# Altium PCB PCB_Master_Traffic_Light.PcbDoc
Units mm, origin at the board's own origin, x right, y up, seen from the top; angles counter-clockwise.
Board outline 128.52 x 89.79 mm, 2 copper layers (Top Layer, Bottom Layer); 46 components, 52 nets, 237 pads, 98 vias.
Unrouted connection lines stored in the file: 1.
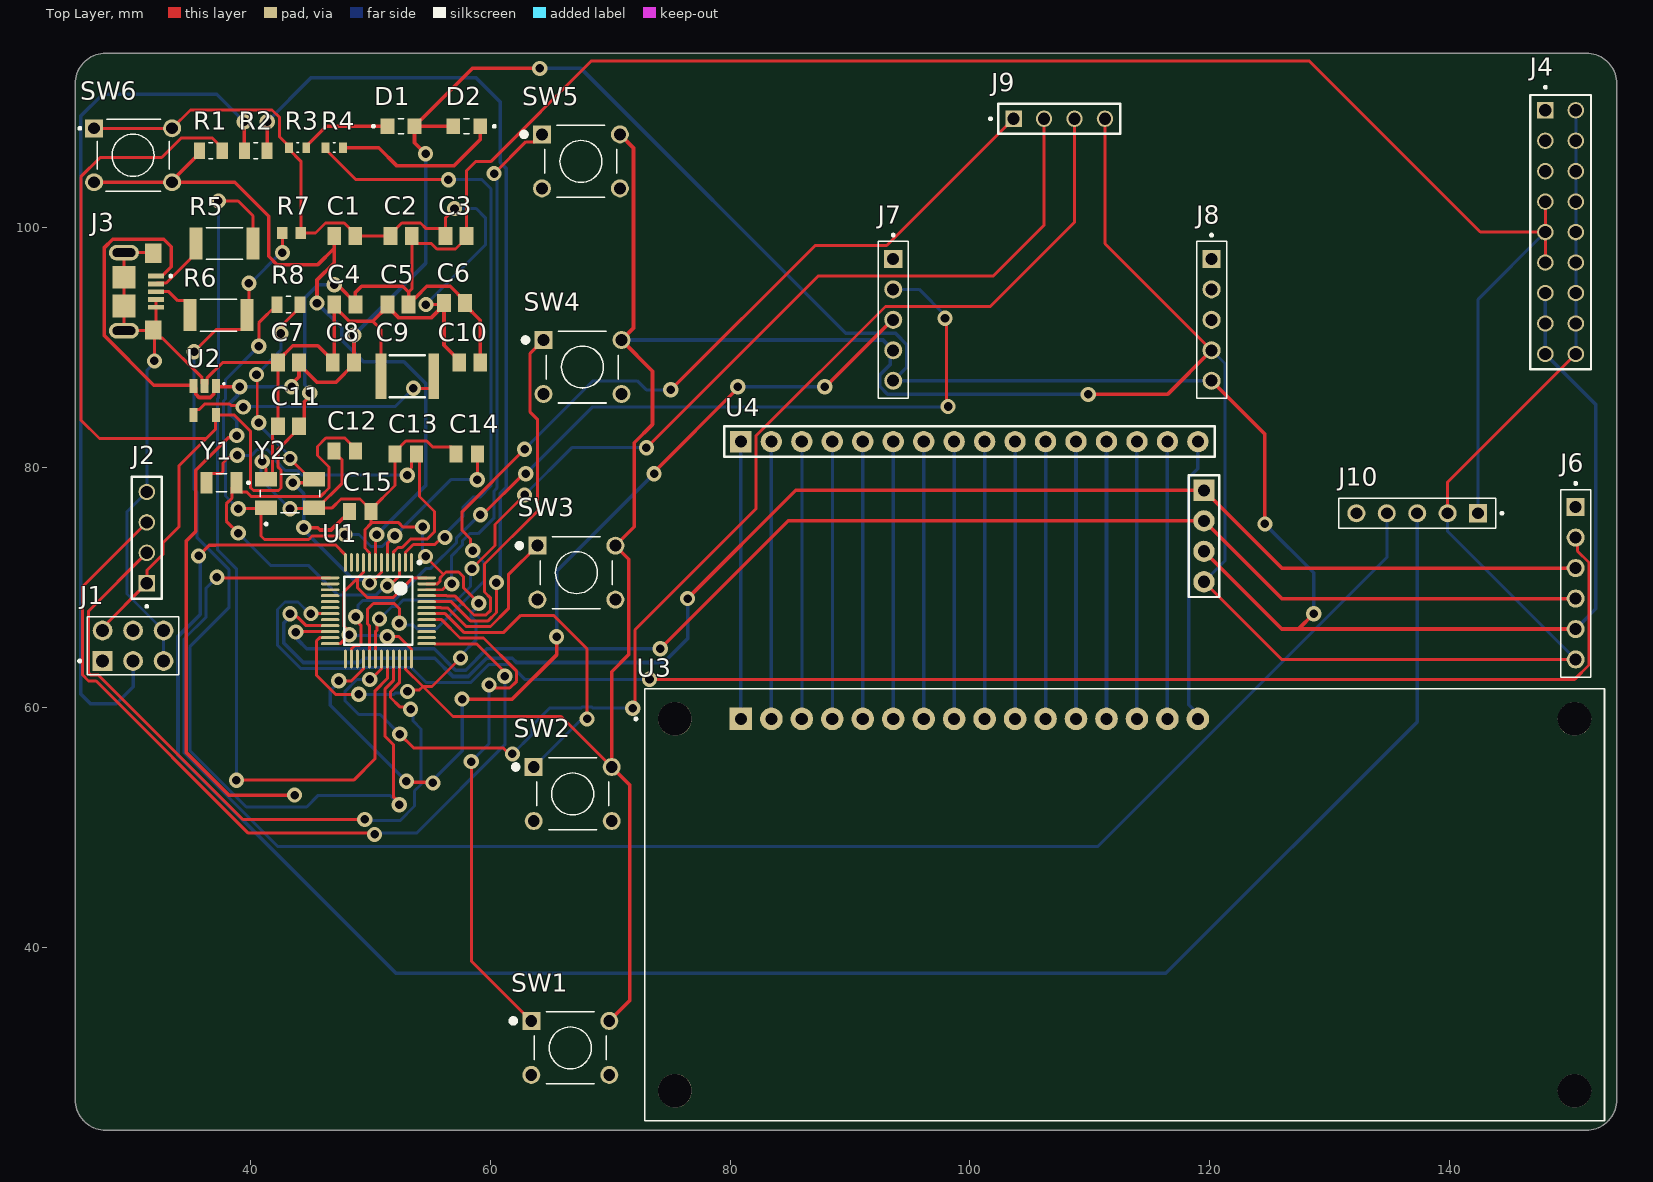
[diagram p0: Top Layer view]
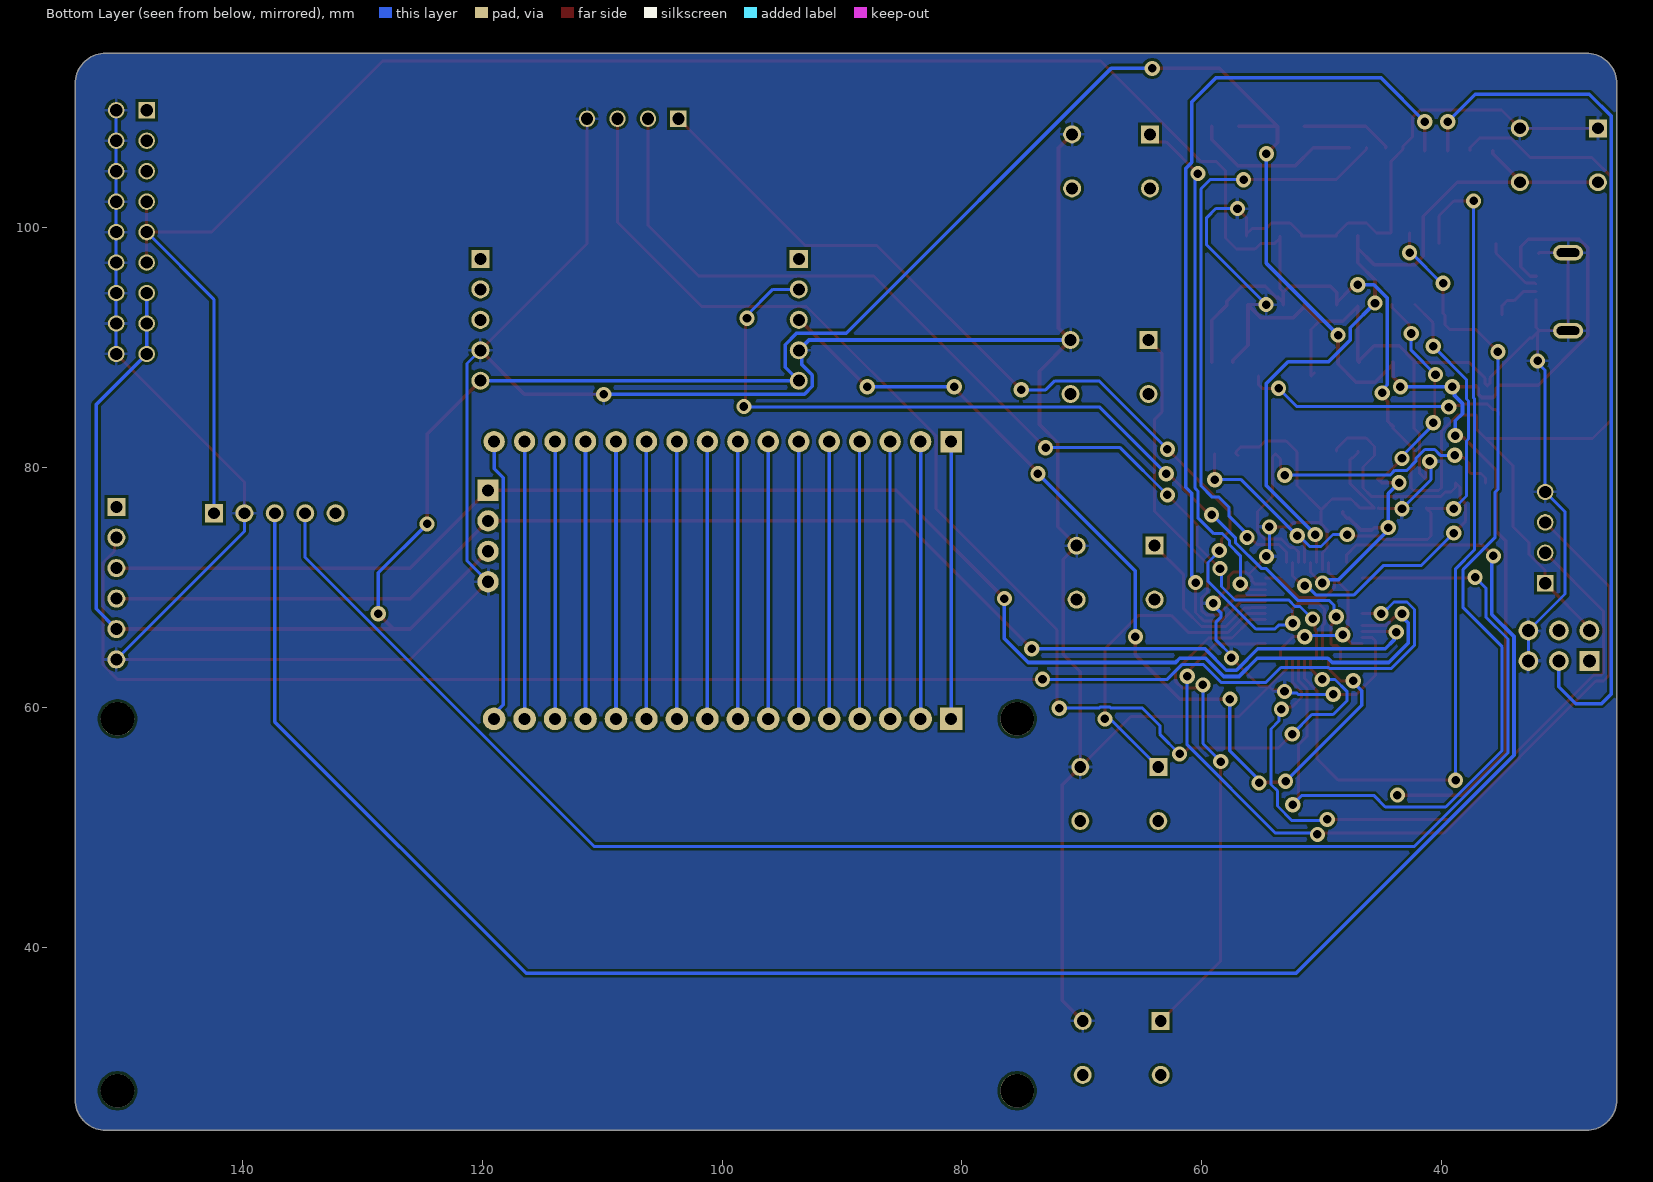
[diagram p1: Bottom Layer view, seen from below]

## Layer stack, top to bottom
Top Solder: solder mask 0.0102, Solder Resist, Dk 3.5
Top Layer: signal copper 0.0356
Dielectric 1: dielectric 0.32, FR-4, Dk 4.8
Bottom Layer: signal copper 0.0356
Bottom Solder: solder mask 0.0102, Solder Resist, Dk 3.5

## Board outline
25.4,112.014 cw(c27.94,112.014) 27.94,114.554 151.384,114.554 cw(c151.384,112.014) 153.924,112.014 153.924,27.305 cw(c151.384,27.305) 151.384,24.765 27.94,24.765 cw(c27.94,27.305) 25.4,27.305 25.4,36.449

## Design rules (kind name [scope] priority, off if disabled: settings)
Clearance [All] p1: gap=0.23 ignorepadtopadclearanceinfootprint=FALSE
PolygonConnect [All] p1: connectstyle=Relief reliefconductorwidth=0.254 reliefentries=4 polygonreliefangle="90 Angle" airgapwidth=0.254
RoutingVias [All] p1: holewidth=0.711 width=1.27 viastyle="Through Hole" minholewidth=0.711 minwidth=1.27 maxholewidth=0.711 maxwidth=1.27
SolderMaskExpansion [All] p1: expansion=0.102 istentingtop=FALSE
SupplyNets "Schematic Supply Nets" [InNet('GND')] p1: voltage=0.000
Width [All] p1: maxlimit=0.3 minlimit=0.23 preferedwidth=0.25 minimp=50.000000 maximp=50.000000 favimp=50.000000
30 further rules are at their usual default settings.

## Components (designator, comment, footprint, x,y, rotation, side; value= is the part's Value field where it differs from the comment)
C1 "1u" CAPC2012X145N 47.87,99.314 r0 top
C2 "100n" CAPC2012X100N#1 52.578,99.314 r0 top
C3 "100n" CAPC2012X100N#1 57.15,99.314 r0 top
C4 "100n" CAPC2012X100N#1 47.879,93.599 r0 top
C5 "100n" CAPC2012X100N#1 52.315,93.599 r0 top
C6 "100n" CAPC2012X100N#1 57.023,93.726 r0 top
C7 "1u" CAPC2012X145N 43.18,88.773 r0 top
C8 "100n" CAPC2012X100N#1 47.752,88.773 r0 top
C9 "22nF" WCAP-CSGP_1812_L4.5W3.2H1.25 53.086,87.63 r0 top
C10 "10u" CAPC2012X100N#1 58.293,88.773 r0 top
C11 "100n" CAPC2012X100N#1 43.18,83.439 r0 top
C12 "20p" CAPC2012X100N#2 47.879,81.407 r0 top
C13 "20p" CAPC2012X100N#2 52.959,81.153 r0 top
C14 "20p" CAPC2012X100N#2 58.039,81.153 r0 top
C15 "20p" CAPC2012X100N#2 49.149,76.327 r180 top
D1 "7012X1" LED_7012X1 52.56,108.458 r0 top
D2 "7012X1" LED_7012X1 58.039,108.458 r180 top
J1 "67997-106HLF" AMPHENOL_67997-106HLF 30.226,65.151 r0 top
J2 "HTSW-104-23-SM-S" SAMTEC_HTSW-104-23-SM-S 31.369,74.168 r270 top
J3 "2013499-1" TE_2013499-1 29.464,94.672 r270 top
J4 "ASM1117" SAMTEC_MTSW-109-13-G-D-905 147.968,109.8 r270 top
J6 "DS3231" HARWIN_M20-7820646 150.495,70.358 r90 top
J7 "LED1" HARWIN_M20-7820546 93.599,92.329 r90 top
J8 "LED2" HARWIN_M20-7820546 120.142,92.329 r90 top
J9 "Traffic Light" SAMTEC_HTSW-104-23-SM-S 107.442,109.093 r180 top
J10 "HC12" HARWIN_M20-7820546 137.287,76.2 r0 top
R1 "10k" RESC2012X60N 36.703,106.426 r180 top
R2 "100k" RESC2012X60N 40.452,106.426 r180 top
R3 "ERJPA3F5100V" RES_ERJPA3F5100V 43.942,106.68 r180 top
R4 "ERJPA3F5100V" RES_ERJPA3F5100V 46.99,106.68 r180 top
R5 "20R" RESC5025X120N 37.846,98.679 r180 top
R6 "20R" RESC5025X120N 37.338,92.71 r180 top
R7 "4k7" RESC1608X55N 43.434,99.568 r180 top
R8 "1M" RESC2012X60N 43.18,93.599 r180 top
SW1 "Button - Normal Mode" SW_FSM8JH 66.675,31.623 r0 top
SW2 "Button - Heavy Mode" SW_FSM8JH 66.877,52.796 r0 top
SW3 "Button - Night Mode" SW_FSM8JH 67.183,71.247 r0 top
SW4 "Button - Control Mode" SW_FSM8JH 67.691,88.392 r0 top
SW5 "Button - Control State" SW_FSM8JH 67.564,105.537 r0 top
SW6 "1825910-6" SW_1825910-6-4 30.226,106.045 r0 top
U1 "STM32F103C8T6" STM-LQFP48_L 50.673,68.072 r270 top
U2 "RT9193-33GB" SOT94P279X129-5N 36.195,85.598 r270 top
U3 "LCD-16X2" MODULE_LCD-16X2 112.899,43.555 r0 top
U4 "I2C" PCF8574 80.899,82.169 r0 top
Y1 "32.768K" XTAL_NX3215SA-32.768K-STD-MUA-14 37.592,78.74 r180 top
Y2 "8MHz" XTAL_ABM3B-8.000MHZ-10-1-U-T 43.307,77.851 r90 top

## Footprints (in the part's own frame and the unit in brackets; to place one, negate y for a bottom-side part, rotate by r counter-clockwise, add the part's x,y. Pads: shape width x height; smd on the part's side, far side on the other; paste and mask are expansions set on the pad)
AMPHENOL_67997-106HLF [mm]
  rect 1.65x1.65 hole 1.1: 01(-2.54,-1.27)
  round 1.65 hole 1.1: 02(-2.54,1.27) 03(0,-1.27) 04(0,1.27) 05(2.54,-1.27) 06(2.54,1.27)
  silkscreen extent -4.56,-2.41 3.81,2.41, body extent -3.81,-2.41 3.81,2.41, height 8.38
CAPC2012X100N#1 [mm]
  rect 1.15x1.47 smd: 1(-0.88,0) 2(0.88,0)
  body extent -1,-0.63 1,0.63, height 1
CAPC2012X100N#2 [mm]
  rect 1.08x1.42 smd: 1(-0.895,0) 2(0.895,0)
  body extent -1,-0.63 1,0.63, height 1
CAPC2012X145N [mm]
  rect 1.15x1.47 smd: 1(-0.88,0) 2(0.88,0)
  body extent -1,-0.63 1,0.63, height 1.45
HARWIN_M20-7820546 [mm]
  rect 1.508x1.508 / inner round 1.508 / far side rect 1.508x1.508 hole 1: 1(5.08,0)
  round 1.508 hole 1: 2(2.54,0) 3(0,0) 4(-2.54,0) 5(-5.08,0)
  silkscreen extent -6.55,-1.25 7.16,1.25
HARWIN_M20-7820646 [mm]
  rect 1.508x1.508 / inner round 1.508 / far side rect 1.508x1.508 hole 1: 1(6.35,0)
  round 1.508 hole 1: 2(3.81,0) 3(1.27,0) 4(-1.27,0) 5(-3.81,0) 6(-6.35,0)
  silkscreen extent -7.82,-1.25 8.43,1.25
LED_7012X1 [mm]
  rect 1.15x1.3 smd: A(1.125,0) C(-1.125,0)
  silkscreen extent -2.4,-0.63 0.23,0.63, body extent -0.62,-1 0.62,1, height 0.73
MODULE_LCD-16X2 [mm]
  rect 1.88x1.88 / inner round 1.88 / far side rect 1.88x1.88 hole 1.016: 1(-32,15.5)
  round 1.88 hole 1.016: 2(-29.46,15.5) 3(-26.92,15.5) 4(-24.38,15.5) 5(-21.84,15.5) 6(-19.3,15.5) 7(-16.76,15.5) 8(-14.22,15.5) 9(-11.68,15.5) 10(-9.14,15.5) 11(-6.6,15.5) 12(-4.06,15.5) 13(-1.52,15.5) 14(1.02,15.5) 15(3.56,15.5) 16(6.1,15.5)
  round 2.8 hole 2.8 unplated: ""(-37.5,-15.5) ""(-37.5,15.5) ""(37.5,-15.5) ""(37.5,15.5)
  silkscreen extent -40.85,-18 40,18, body extent -40,-18 40,18, height 10.2
PCF8574 [mil]
  rect 70x70 hole 40: 1(0,0) 17(1520,-160)
  round 70 hole 40: 2(100,0) 3(200,0) 4(300,0) 5(400,0) 6(500,0) 7(600,0) 8(700,0) 9(800,0) 10(900,0) 11(1000,0) 12(1100,0) 13(1200,0) 14(1300,0) 15(1400,0) 16(1500,0) 18(1520,-260) 19(1520,-360) 20(1520,-460)
  silkscreen extent -55,-510 1570,50, body extent -62,-659 1572,50, height 330
RES_ERJPA3F5100V [mm]
  rect 0.65x0.9 smd: 1(-0.725,0) 2(0.725,0)
  silkscreen extent -0.08,-0.4 0.08,0.4, body extent -0.8,-0.4 0.8,0.4, height 0.45
RESC1608X55N [mm]
  rect 0.87x0.97 smd: 1(-0.78,0) 2(0.78,0)
  body extent -0.8,-0.4 0.8,0.4, height 0.55
RESC2012X60N [mm]
  rect 0.92x1.38 smd: 1(-0.955,0) 2(0.955,0)
  silkscreen extent -0.17,-0.68 0.17,0.68, body extent -1,-0.63 1,0.63, height 0.6
RESC5025X120N [mm]
  rect 1.07x2.67 smd: 1(-2.38,0) 2(2.38,0)
  silkscreen extent -1.52,-1.32 1.52,1.32
SAMTEC_HTSW-104-23-SM-S [mm]
  rect 1.37x1.37 / inner round 1.37 / far side rect 1.37x1.37 hole 1.02: 01(3.81,0)
  round 1.37 hole 1.02: 02(1.27,0) 03(-1.27,0) 04(-3.81,0)
  silkscreen extent -5.08,-1.24 5.83,1.24
SAMTEC_MTSW-109-13-G-D-905 [mm]
  rect 1.37x1.37 hole 1.02: 01(0,0)
  round 1.37 hole 1.02: 02(0,2.54) 03(2.54,0) 04(2.54,2.54) 05(5.08,0) 06(5.08,2.54) 07(7.62,0) 08(7.62,2.54) 09(10.16,0) 10(10.16,2.54) 11(12.7,0) 12(12.7,2.54) 13(15.24,0) 14(15.24,2.54) 15(17.78,0) 16(17.78,2.54) 17(20.32,0) 18(20.32,2.54)
  silkscreen extent -2.02,-1.27 21.59,3.81
SOT94P279X129-5N [mm]
  rrect12% 1.17x0.67 smd: 1(-1.22,0.94) 2(-1.22,0) 3(-1.22,-0.94) 4(1.22,-0.94) 5(1.22,0.94)
  silkscreen extent -1.47,1.53 -1.33,1.67, body extent -1.4,-1.45 1.4,1.45, height 1.3
STM-LQFP48_L [mm] "QFP, 48-Leads, Body 7x7mm, Pitch 0.5mm, IPC High Density"
  oval 1.55x0.25 smd: 1(-4.025,2.75) 2(-4.025,2.25) 3(-4.025,1.75) 4(-4.025,1.25) 5(-4.025,0.75) 6(-4.025,0.25) 7(-4.025,-0.25) 8(-4.025,-0.75) 9(-4.025,-1.25) 10(-4.025,-1.75) 11(-4.025,-2.25) 12(-4.025,-2.75) 25(4.025,-2.75) 26(4.025,-2.25) 27(4.025,-1.75) 28(4.025,-1.25) 29(4.025,-0.75) 30(4.025,-0.25) 31(4.025,0.25) 32(4.025,0.75) 33(4.025,1.25) 34(4.025,1.75) 35(4.025,2.25) 36(4.025,2.75)
  oval 0.25x1.55 smd: 13(-2.75,-4.025) 14(-2.25,-4.025) 15(-1.75,-4.025) 16(-1.25,-4.025) 17(-0.75,-4.025) 18(-0.25,-4.025) 19(0.25,-4.025) 20(0.75,-4.025) 21(1.25,-4.025) 22(1.75,-4.025) 23(2.25,-4.025) 24(2.75,-4.025) 37(2.75,4.025) 38(2.25,4.025) 39(1.75,4.025) 40(1.25,4.025) 41(0.75,4.025) 42(0.25,4.025) 43(-0.25,4.025) 44(-0.75,4.025) 45(-1.25,4.025) 46(-1.75,4.025) 47(-2.25,4.025) 48(-2.75,4.025)
  silkscreen extent -4.15,-2.85 2.85,3.55, body extent -3.5,-3.5 3.5,3.5, height 1.6
SW_1825910-6-4 [mm]
  rect 1.498x1.498 / inner round 1.498 / far side rect 1.498x1.498 hole 0.99: 1(-3.25,2.25)
  round 1.498 hole 0.99: 2(3.25,2.25) 3(-3.25,-2.25) 4(3.25,-2.25)
  silkscreen extent -4.54,-3 3,3, body extent -3,-3.9 3,3.9, height 5.01
SW_FSM8JH [mm]
  rect 1.498x1.498 / inner round 1.498 / far side rect 1.498x1.498 hole 0.99: 1(-3.25,2.25)
  round 1.498 hole 0.99: 2(-3.25,-2.25) 3(3.25,2.25) 4(3.25,-2.25)
  silkscreen extent -4.95,-3 3,3, body extent -3,-3.95 3,3.95, height 9.5
TE_2013499-1 [mm]
  rect 0.4x1.35 smd: 1(-1.3,2.675) 2(-0.65,2.675) 3(0,2.675) 4(0.65,2.675) 5(1.3,2.675)
  rect 1.6x1.4 smd: SH1(-3.2,2.45) SH4(3.2,2.45)
  rect 1.9x1.9 smd: SH2(-1.2,0) SH3(1.2,0)
  oval 1.31x2.5 hole 0.71 slot 1.9 at 90 deg: SH5(3.255,0) SH6(-3.255,0)
  silkscreen extent -1.4,3.8 -1.2,4, body extent -4,-2.49 4,3.11, height 2.76
WCAP-CSGP_1812_L4.5W3.2H1.25 [mm] "Ceramic Capacitors, body 4.5x3.2mm"
  rect 0.9x3.8 smd: 1(-2.2,0) 2(2.2,0)
  silkscreen extent -1.45,-1.75 1.45,1.75, body extent -2.25,-1.6 2.25,1.6, height 1.25
XTAL_ABM3B-8.000MHZ-10-1-U-T [mm]
  rect 1.2x1.8 smd: 1(-1.2,2) 2(-1.2,-2) 3(1.2,-2) 4(1.2,2)
  silkscreen extent -2.65,-2.5 1.6,2.5, body extent -1.58,-2.5 1.6,2.5, height 1.1
XTAL_NX3215SA-32.768K-STD-MUA-14 [mm]
  rect 1x1.8 smd: 1(-1.25,0) 2(1.25,0)
  silkscreen extent -2.35,-0.75 0.43,0.75

## Part data
C1 C7: library part C2012X5R1E105K125AA, "1 ÂµF Â±10% 25V Ceramic Capacitor X5R 0805 (2012 Metric)", Package="2012 TDK", Check_prices=https://www.snapeda.com/parts/C2012X5R1E105K125AA/TDK/view-part/?ref=eda, Digi-Key_Part_Number=445-1419-2-ND, MF=TDK, MP=C2012X5R1E105K125AA, SnapEDA_Link=https://www.snapeda.com/parts/C2012X5R1E105K125AA/TDK/view-part/?ref=snap
C2 C3 C4 C5 C6 C8 C11: library part C2012X7R1H104K085AA, "0.1 ÂµF Â±10% 50V Ceramic Capacitor X7R 0805 (2012 Metric)", Package="2012 TDK", Check_prices=https://www.snapeda.com/parts/C2012X7R1H104K085AA/TDK/view-part/?ref=eda, Digi-Key_Part_Number=445-7534-1-ND, MF=TDK, MP=C2012X7R1H104K085AA, Purchase-URL=https://pricing.snapeda.com/search/part/C2012X7R1H104K085AA/?ref=eda, SnapEDA_Link=https://www.snapeda.com/parts/C2012X7R1H104K085AA/TDK/view-part/?ref=snap
C9: library part 885012010015, "WCAP-CSGP Multilayer Ceramic Chip Capacitor, General Purpose, size 1812, NP0, 22nF, 50V", Capacitance Tolerance=+/-5%, Case/Size Code=1812, Insulation Resistance=10GΩ, Manufacturer="Wurth Elektronik", Max Operating Temperature=125°C, Min Operating Temperature=-55°C, Rated Voltage (DC)=50V, Capacitance=22nF, Category="Multilayer Ceramic Chip Capacitors", Ceramic Type=NP0, ComponentLink1Description="Website Link", ComponentLink1URL=https://www.we-online.com/redexpert/article/885012010015?ad, ComponentLink2Description="Datasheet Link", ComponentLink2URL=https://www.we-online.com/redexpert/spec/885012010015?ad, Height=1.25mm, Length=4.5mm, Manufacturer Part Number=885012010015, Match Code=WCAP-CSGP, Mount="Surface Mount", Packaging="Tape and Reel", Q Factor=1000, Technical Reference=NP01812223J050DFCT10000, Width=3.2mm
C10: library part C2012X5R1C106M085AC, "10ÂµF Â±20% 16V Ceramic Capacitor X5R 0805 (2012 Metric)", Package="2012 TDK", Availability="In Stock", Check_prices=https://www.snapeda.com/parts/C2012X5R1C106M085AC/TDK/view-part/?ref=eda, MF=TDK, MP=C2012X5R1C106M085AC, Price=None, Purchase-URL=https://pricing.snapeda.com/search/part/C2012X5R1C106M085AC/?ref=eda, SnapEDA_Link=https://www.snapeda.com/parts/C2012X5R1C106M085AC/TDK/view-part/?ref=snap
C12 C13 C14 C15: library part GQM2195C2E200JB12D, "SMD Capacitor C0G(EIA) with Capacitance: 20pF Tol. 5%. Rated Voltage: 250Vdc", Package="2012 Murata", Availability=Warning, MF=Murata, MP=GQM2195C2E200JB12D, Price=None, Purchase-URL=https://pricing.snapeda.com/search/part/GQM2195C2E200JB12D/?ref=eda, SnapEDA_Link=https://www.snapeda.com/parts/GQM2195C2E200JB12D/Murata/view-part/4378826/?ref=snap
D1 D2: "Red - LED Indication - Discrete 1.7V 0805 (2012 Metric)", Package="0805 Visual Communications", Availability="In Stock", Check_prices=https://www.snapeda.com/parts/7012X1/Visual+Communications/view-part/?ref=eda, MF=VCC, MP=7012X1, Price=None, Purchase-URL=https://pricing.snapeda.com/search/part/7012X1/?ref=eda, SnapEDA_Link=https://www.snapeda.com/parts/7012X1/Visual+Communications/view-part/?ref=snap
J1: "BergStikÂ®, Board to Board connector, Unshrouded vertical header, Through Hole, Double Row, 6 Positions, 2.54 mm (0.100in) Pitch", Package=None, Availability="In Stock", Check_prices=https://www.snapeda.com/parts/67997-106HLF/Amphenol+FCI/view-part/?ref=eda, MF="Amphenol ICC", MP=67997-106HLF, Price=None, Purchase-URL=https://pricing.snapeda.com/search/part/67997-106HLF/?ref=eda, SnapEDA_Link=https://www.snapeda.com/parts/67997-106HLF/Amphenol+FCI/view-part/?ref=snap
J2: "HEADER, 4 CONTACTS, 1 ROW, THROUGH HOLE, 2.54 MM; Connector Systems:Board-to-Board; Pitch Spacing:2.54mm; No. of Rows:1Rows; No. of Contacts:4Contacts; Contact Termination Type:Through Hole; Product Range:HTSW Series; Gender:Header RoHS Compliant: Yes", Package=None, Availability="In Stock", Check_prices=https://www.snapeda.com/parts/HTSW10423SMS/Samtec/view-part/?ref=eda, MF=Samtec, MP=HTSW10423SMS, Price=None, Purchase-URL=https://pricing.snapeda.com/search/part/HTSW10423SMS/?ref=eda, SnapEDA_Link=https://www.snapeda.com/parts/HTSW10423SMS/Samtec/view-part/?ref=snap
J3: Package=None, Availability=Unavailable, MP=2013499-1, Price=None
J4: library part MTSW-109-13-G-D-905, Package=None, Availability=Unavailable, MP=MTSW-109-13-G-D-905, Price=None
J6: library part M20-7820646, Package=None, Availability=Unavailable, MP=M20-7820646, Price=None
J7 J8 J10: library part M20-7820546, Package=None, Availability=Unavailable, MP=M20-7820546, Price=None
J9: library part HTSW-104-23-SM-S, "HEADER, 4 CONTACTS, 1 ROW, THROUGH HOLE, 2.54 MM; Connector Systems:Board-to-Board; Pitch Spacing:2.54mm; No. of Rows:1Rows; No. of Contacts:4Contacts; Contact Termination Type:Through Hole; Product Range:HTSW Series; Gender:Header RoHS Compliant: Yes", Package=None, Availability="In Stock", Check_prices=https://www.snapeda.com/parts/HTSW10423SMS/Samtec/view-part/?ref=eda, MF=Samtec, MP=HTSW10423SMS, Price=None, Purchase-URL=https://pricing.snapeda.com/search/part/HTSW10423SMS/?ref=eda, SnapEDA_Link=https://www.snapeda.com/parts/HTSW10423SMS/Samtec/view-part/?ref=snap
R1: library part RC0805FR-0710KL, "10 kOhms Â±1% 0.125W, 1/8W Chip Resistor 0805 (2012 Metric) Moisture Resistant Thick Film", Package="2012 Rohm Semiconductor", Availability="In Stock", Check_prices=https://www.snapeda.com/parts/RC0805FR-0710KL/Yageo/view-part/?ref=eda, MF=Yageo, MP=RC0805FR-0710KL, Price=None, Purchase-URL=https://pricing.snapeda.com/search/part/RC0805FR-0710KL/?ref=eda, SnapEDA_Link=https://www.snapeda.com/parts/RC0805FR-0710KL/Yageo/view-part/?ref=snap
R2: library part RC0805FR-07100KL, "100 kOhms Â±1% 0.125W, 1/8W Chip Resistor 0805 (2012 Metric) Moisture Resistant Thick Film", Package="2012 Yageo", Check_prices=https://www.snapeda.com/parts/RC0805FR-07100KL/Yageo/view-part/?ref=eda, MF=Yageo, MP=RC0805FR-07100KL, SnapEDA_Link=https://www.snapeda.com/parts/RC0805FR-07100KL/Yageo/view-part/?ref=snap
R3 R4: "RES, THICK FILM, 510R, 1%, 0.25W, 0603", Package="1608-2 Panasonic", Check_prices=https://www.snapeda.com/parts/ERJ-PA3F5100V/Panasonic/view-part/?ref=eda, MF=Panasonic, MP=ERJ-PA3F5100V, SnapEDA_Link=https://www.snapeda.com/parts/ERJ-PA3F5100V/Panasonic/view-part/?ref=snap
R5 R6: library part 3-2176397-2, Package=None, Availability=Unavailable, MP=3-2176397-2, Price=None
R7: library part CRG0603F4K7, "Resistor, Thick Film, Res 4.7 Kilohms, Pwr-Rtg 0.1 W, Tol 1%, SMT, 0603", Package=0603, Power_Rating=".1 W", Resistance=4.7K, Tolerance=1%, Voltage_Rating="50 V", Check_prices=https://www.snapeda.com/parts/CRG0603F4K7/TE+Connectivity+Passive+Product/view-part/?ref=eda, EU_RoHS_Compliance="Compliant with Exemptions", MF="TE Connectivity", MP=CRG0603F4K7, SnapEDA_Link=https://www.snapeda.com/parts/CRG0603F4K7/TE+Connectivity+Passive+Product/view-part/?ref=snap
R8: library part RC0805FR-071ML, "1 MOhms Â±1% 0.125W, 1/8W Chip Resistor 0805 (2012 Metric) Moisture Resistant Thick Film", Package="2012 Yageo", Check_prices=https://www.snapeda.com/parts/RC0805FR-071ML/Yageo/view-part/?ref=eda, MF=Yageo, MP=RC0805FR-071ML, SnapEDA_Link=https://www.snapeda.com/parts/RC0805FR-071ML/Yageo/view-part/?ref=snap
SW1 SW2 SW3 SW4 SW5: library part FSM8JH, "Tactile Switch SPST-NO Top Actuated Through Hole", Package=None, Availability="In Stock", Check_prices=https://www.snapeda.com/parts/FSM8JH/TE+Connectivity+ALCOSWITCH+Switches/view-part/?ref=eda, MF="TE Connectivity", MP=FSM8JH, Price=None, SnapEDA_Link=https://www.snapeda.com/parts/FSM8JH/TE+Connectivity+ALCOSWITCH+Switches/view-part/?ref=snap
SW6: "Switch Push Button OFF (ON) SPST Round Button 0.05A 24VDC Momentary Contact PC Pins Thru-Hole", Package=None, Check_prices=https://www.snapeda.com/parts/1825910-6/TE+Connectivity+ALCOSWITCH+Switches/view-part/?ref=eda, Digi-Key_Part_Number=450-1650-ND, MF="TE Connectivity", MP=1825910-6, Purchase-URL=https://pricing.snapeda.com/search/part/1825910-6/?ref=eda, SnapEDA_Link=https://www.snapeda.com/parts/1825910-6/TE+Connectivity+ALCOSWITCH+Switches/view-part/?ref=snap
U1: library part CMP-0237-00215-3, "ARM Cortex-M3 32-bit MCU, 64 KB Flash, 20 KB Internal RAM, 37 I/Os, 48-pin LQFP, -40 to 85 degC, Tray", I/Os (High Current)=37, Operating Frequency(F) (Processor speed) (MHz)=72, Supply Voltage(Vcc) min (V)=2, A/D Converter="2x12-bit (10 Channel)", ComponentLink1Description="Manufacturer URL", ComponentLink1URL=http://www.st.com/web/en/home.html, ComponentLink2Description=Datasheet, ComponentLink2URL=http://www.st.com/st-web-ui/static/active/en/resource/technical/document/datasheet/CD00161566.pdf, ComponentLink3Description="Package Specification", ComponentLink3URL=http://www.st.com/st-web-ui/static/active/en/resource/technical/document/datasheet/DM00058181.pdf, Core="ARM Cortex-M3", DatasheetVersion="Rev. 16", FLASH Size (Prog) (kB)=64, Internal RAM Size (kB)=20, Mounting Technology="Surface Mount", PackageDescription="48-Pin Low Profile Quad Flat Package, 7 x 7 mm Body, 0.5 mm Pitch", PackageReference=LQFP48, PackageVersion="Rev. 6, 06/2013", Packing=Tray, PartNumber=STM32F103C8T6
U2: "Linear Voltage Regulator IC Positive Fixed 1 Output 300mA TSOT-23-5", Package="SOT-23-5 Richtek", Check_prices=https://www.snapeda.com/parts/RT9193-33GB/Richtek+USA+Inc./view-part/?ref=eda, Digi-Key_Part_Number=1028-1014-2-ND, MF="Richtek USA", MP=RT9193-33GB, Purchase-URL=https://pricing.snapeda.com/search/part/RT9193-33GB/?ref=eda, SnapEDA_Link=https://www.snapeda.com/parts/RT9193-33GB/Richtek+USA+Inc./view-part/?ref=snap
U3: "Display Development Tools 16x2 Black on Green Char LCD w Backlight", Package=None, Check_prices=https://www.snapeda.com/parts/LCD-16X2/Gravitech/view-part/?ref=eda, MF=Gravitech, MP=LCD-16X2, SnapEDA_Link=https://www.snapeda.com/parts/LCD-16X2/Gravitech/view-part/?ref=snap
U4: library part PCF8574
Y1: library part NX3215SA-32.768K-STD-MUA-14, "32.768kHz Â±20ppm Crystal 6pF 70 kOhms 2-SMD, No Lead  MANUFACTURER: NIHON DEMPA KOGYO", Package=None, Availability=Unavailable, MP=NX3215SA-32.768K-STD-MUA-14, Price=None
Y2: library part ABM3B-8.000MHZ-10-1-U-T, "8 MHz Â±10ppm Crystal 10pF 200 Ohms 4-SMD, No Lead", Package="SMD-4 Abracon LLC", Check_prices=https://www.snapeda.com/parts/ABM3B-8.000MHZ-10-1-U-T/Abracon/view-part/?ref=eda, MF=Abracon, MP=ABM3B-8.000MHZ-10-1-U-T, SnapEDA_Link=https://www.snapeda.com/parts/ABM3B-8.000MHZ-10-1-U-T/Abracon/view-part/?ref=snap

## Via types
v1: diameter 1.27, hole 0.711, Top Layer to Bottom Layer, 98 vias

## Nets (pads, with @x,y where several pads share a name; then routed paths per layer and width w, separated by ;. In a path a pad name is that pad's centre, name@x,y a point inside that pad or via, vN(x,y) a via of type N, cw(c..) or ccw(c..) an arc to the next point about the centre after c; other vN are vias at no path point)
3V3: U1.9 U1.24 U1.36 U1.48 | length 22.9
  Top Layer w0.25: U1.24 47.506,65.322 v1(48.256,66.072) 48.256,66.348 47.796,66.808 47.796,69.641 48.949,70.794 ; U1.9 49.423,71.268 48.949,70.794 ; v1(51.411,65.913) 52.386,65.913 53.423,64.876 U1.36 ; U1.48 53.548,70.822 51.887,69.161 49.762,69.161 48.949,69.974 48.949,70.794
  Bottom Layer w0.25: v1(48.256,66.072) 48.335,65.993 51.331,65.993 v1(51.411,65.913)
A: U3.15 U4.15 | length 23.1
  Bottom Layer w0.3: U3.15 U4.15
BOOT0: R2.1 U1.44 | length 74.1
  Top Layer w0.25: U1.44 56.752,68.822 58.341,67.232 59.833,67.232 60.521,67.92 v1(60.521,70.421)
  Top Layer w0.3: v1(41.402,108.839) 41.402,106.431 R2.1
  Bottom Layer w0.3: v1(41.402,108.839) 45.085,112.522 58.801,112.522 60.833,110.49 60.833,105.448 61.34,104.941 61.34,78.362 60.833,77.855 60.833,70.996 60.521,70.684 v1(60.521,70.421)
DB0: U3.7 U4.7 | length 23.1
  Bottom Layer w0.3: U3.7 U4.7
DB1: U3.8 U4.8 | length 23.1
  Bottom Layer w0.3: U3.8 U4.8
DB2: U3.9 U4.9 | length 23.1
  Bottom Layer w0.3: U3.9 U4.9
DB3: U3.10 U4.10 | length 23.1
  Bottom Layer w0.3: U3.10 U4.10
DB4: U3.11 U4.11 | length 23.1
  Bottom Layer w0.3: U3.11 U4.11
DB5: U3.12 U4.12 | length 23.1
  Bottom Layer w0.3: U3.12 U4.12
DB6: U3.13 U4.13 | length 23.1
  Bottom Layer w0.3: U3.13 U4.13
DB7: U3.14 U4.14 | length 23.1
  Bottom Layer w0.3: U3.14 U4.14
E: U3.6 U4.6 | length 23.1
  Bottom Layer w0.3: U3.6 U4.6
GND: C1.2 C2.1 C3.1 C4.1 C5.1 C6.1 C7.1 C8.1 C9.1 C10.1 C11.1 C12.1 C13.1 C14.1 C15.1 J1.05 J1.06 J2.04 J3.4 J3.5 J3.SH1 J3.SH2 J3.SH3 J3.SH4 J3.SH5 J3.SH6 J4.02 J4.04 J4.06 J4.08 J4.10 J4.12 J4.14 J4.16 J4.18 J6.6 J7.4 J8.4 J9.04 J10.2 R3.2 R7.1 SW1.3 SW2.3 SW3.3 SW4.3 SW5.3 SW6.1 SW6.2 U1.8 U1.23 U1.35 U1.47 U2.2 U4.20 Y2.2 Y2.4 | length 521.5
  Top Layer w0.25: SW6.1 SW6.2 35.01,109.829 41.812,109.829 42.415,109.227 42.415,107.607 43.217,106.805 R3.2 43.217,106.555 44.214,105.558 R7.1 45.432,99.568 46.268,100.404 47.82,100.404 48.75,99.474 C1.2 C2.1 51.698,99.474 52.628,100.404 54.18,100.404 54.66,99.924 55.82,99.924 C3.1@56.27,99.474 ; J3.SH1 31.859,97.927 J3.SH6 J3.SH2 J3.SH3 J3.SH5 31.859,91.417 J3.SH4 ; v1(32.004,88.9) J3.SH4@32.004,91.282 ; J3.4 J3.5 32.139,91.697 J3.SH4 ; v1(40.992,80.518) 40.992,80.242 41.307,79.927 Y2.4 ; Y2.4@41.362,79.051 41.837,79.526 41.837,82.816 42.3,83.279 C11.1 C7.1 37.692,88.773 36.405,87.486 36.405,87.028 U2.2 35.985,87.028 35.985,87.486 32.674,90.797 32.489,90.797 J3.SH4@32.004,91.282 ; v1(43.307,76.581) 45.237,76.581 Y2.2 ; U1.23 45.781,65.822 45.518,65.559 45.518,62.683 47.095,61.106 v1(49.047,61.106) ; C12.1 46.984,81.237 47.399,80.822 47.479,80.822 47.625,80.676 47.625,78.669 45.607,76.651 46.826,76.651 47.567,77.392 49.149,77.392 50.044,76.497 52.064,78.517 C13.1 52.064,81.323 52.959,82.218 54.708,82.218 55.188,81.738 56.729,81.738 57.144,81.323 C14.1 C14.1@56.997,81.006 ; U1.8@49.923,71.464 U1.8 49.923,72.936 49.556,73.303 49.556,74.832 50.044,75.32 ; C15.1 50.044,75.32 ; 50.198,92.202 50.886,91.514 C9.1 C9.1@50.618,87.898 ; U1.35 52.923,63.218 54.388,61.754 ; v1(53.103,61.341) 53.241,61.479 54.113,61.479 54.388,61.754 ; v1(54.356,75.057) 52.718,75.057 52.363,75.412 50.136,75.412 50.044,75.32 ; v1(54.61,72.597) 56.072,71.135 56.072,71.058 ; v1(54.635,93.599) 56.11,93.599 C6.1@56.143,93.566 ; U1.47 55.59,70.322 55.828,70.56 55.828,70.814 56.072,71.058 ; C3.1 C3.1@56.27,99.474 ; v1(57.023,101.6) 56.27,100.847 C3.1@56.27,99.474 ; v1(57.531,64.135) 55.15,61.754 54.388,61.754 ; v1(59.051,68.703) 59.051,68.708 57.785,69.974 57.785,70.883 57.367,71.302 56.316,71.302 56.072,71.058 ; SW2.3 65.922,59.251 56.89,59.251 54.388,61.754 ; J9.04 111.252,98.679 J8.4 ; U4.20 125.984,64.008 J6.6 ; J10.2 139.827,78.798 J4.18 ; J3.SH4 31.914,91.372 J3.SH4@32.004,91.282
  Top Layer w0.3: C7.1 42.3,88.933 43.537,90.17 45.635,90.17 46.872,88.933 C8.1 46.999,88.9 46.999,93.439 48.236,92.202 50.198,92.202 C5.1@51.435,93.439 ; C5.1 C5.1@51.435,93.439 ; C10.1 57.413,88.933 56.143,90.203 56.143,93.566 55.061,92.484 52.39,92.484 C5.1@51.435,93.439 ; SW1.3 71.628,35.576 71.628,53.545 SW2.3 70.127,62.99 71.562,64.425 71.562,72.368 SW3.3 72.01,75.074 72.01,82.081 73.533,83.604 73.533,88.05 SW4.3 71.943,91.644 71.943,106.658 SW5.3 ; v1(109.855,86.106) 116.459,86.106 J8.4
  Bottom Layer w0.25: v1(32.004,88.9) 32.004,88.742 31.369,88.107 J2.04 29.718,76.327 29.718,69.469 J1.06 J1.05 ; v1(40.992,80.518) 40.894,80.42 40.894,78.994 v1(43.307,76.581) ; v1(49.047,61.106) 51.968,61.106 52.093,61.231 52.993,61.231 v1(53.103,61.341) ; v1(54.356,75.057) 54.356,73.127 54.61,72.873 v1(54.61,72.597) ; v1(54.635,93.599) 59.591,98.555 59.591,100.838 58.829,101.6 v1(57.023,101.6) ; v1(57.531,64.135) 57.531,64.339 58.801,65.609 58.801,67.146 58.417,67.53 58.417,67.908 59.051,68.542 v1(59.051,68.703) ; U4.20 121.251,72.229 121.251,88.68 J8.4 ; J10.2 139.827,74.676 J6.6 ; J4.18 J4.16 J4.14 J4.12 J4.10 J4.08 J4.06 J4.04 J4.02
  Bottom Layer w0.3: SW4.3 92.746,90.642 J7.4 93.368,89.558 93.368,88.622 92.465,87.719 92.465,86.779 93.129,86.115 v1@109.846,86.115
K: U3.16 U4.16 | length 23.7
  Bottom Layer w0.3: U3.16 118.999,59.482 118.238,60.243 118.238,79.151 118.999,79.912 U4.16
NetC9_2: C9.2 U2.4 | length 22.1
  Top Layer w0.25: U2.4 35.255,84.628 35.465,84.838 35.715,84.838 36.195,85.318 38.274,85.318 38.399,85.193 39.27,85.193 v1(39.409,85.054) ; v1(53.594,86.614) 54.961,86.614 55.286,86.939 C9.2
  Bottom Layer w0.25: v1(39.409,85.054) 39.445,85.09 52.07,85.09 v1(53.594,86.614)
NetD1_C: D1.C R3.1 | length 7.6
  Top Layer w0.3: R3.1 44.667,106.805 46.32,108.458 D1.C
NetD2_C: D2.C R4.1 | length 14.1
  Top Layer w0.3: R4.1 50.699,106.68 52.222,105.157 56.963,105.157 59.164,107.358 D2.C
NetJ1_03: J1.03 R2.2 | length 73.4
  Top Layer w0.3: R2.2 v1(39.497,108.839)
  Bottom Layer w0.3: J1.03 30.226,61.722 28.829,60.325 26.67,60.325 25.847,61.148 25.847,109.286 27.686,111.125 37.211,111.125 v1(39.497,108.839)
NetJ3_2: J3.2 R5.2 | length 5.2
  Top Layer w0.25: J3.2 32.214,95.397 32.984,95.397 35.466,97.879 R5.2
NetJ3_3: J3.3 R6.2 | length 4.1
  Top Layer w0.25: J3.3 33.205,94.672 33.957,93.92 34.548,93.92 34.958,93.51 R6.2
OSCIN: C14.2 R8.2 U1.5 Y2.1 | length 49.9
  Top Layer w0.25: v1(38.989,76.581) Y2.1@41.237,76.581 ; v1(40.704,90.117) 40.704,92.078 R8.2 ; Y2.1 Y2.1@41.237,76.581 ; v1(47.879,74.422) 47.755,74.298 45.145,74.298 44.86,74.013 41.176,74.013 40.894,74.295 40.894,76.238 Y2.1@41.237,76.581 ; U1.5 51.423,72.747 51.423,73.67 52.045,74.292 v1(52.045,74.33) ; v1(58.926,78.996) 58.926,81.145 C14.2
  Bottom Layer w0.25: v1(38.989,76.581) 37.924,77.646 37.924,82.22 37.761,82.384 37.761,85.555 37.924,85.719 37.924,87.337 v1(40.704,90.117) ; v1(47.879,74.422) 49.061,74.422 50.051,73.432 51,73.432 51.898,74.33 v1(52.045,74.33) ; v1@51.972,74.404 52.118,74.404 56.71,78.996 v1(58.926,78.996)
OSCOUT: C15.2 R8.1 U1.6 Y2.3 | length 38.5
  Top Layer w0.25: v1(40.513,87.757) 40.576,87.694 40.576,83.875 v1(40.699,83.752) ; v1(42.545,91.186) 42.74,91.381 42.74,91.974 44.135,93.369 R8.1 ; v1(43.307,80.772) 43.307,80.751 45.007,79.051 Y2.3 ; v1(49.939,70.384) 50.039,70.384 50.923,71.268 U1.6
  Top Layer w0.3: v1(43.552,78.74) 44.996,78.74 Y2.3 ; v1(44.45,75.003) 45.621,75.003 45.821,74.803 46.73,74.803 47.694,75.767 47.864,75.767 48.254,76.157 C15.2
  Bottom Layer w0.25: v1(40.513,87.757) 42.545,89.789 v1(42.545,91.186) ; v1(40.699,83.752) 40.699,83.57 43.307,80.962 v1(43.307,80.772)
  Bottom Layer w0.3: v1(43.552,78.74) 44.45,77.842 44.45,74.803 48.582,70.671 49.471,70.671 49.758,70.384 v1(49.939,70.384)
Out3.3: C2.2 C3.2 C4.2 C5.2 C6.2 C10.2 C11.2 J1.01 J1.02 J2.01 J4.07 J4.09 J4.11 J10.1 R1.1 U2.5 | length 264.8
  Top Layer w0.25: J1.02 27.686,66.675 J2.01 31.369,71.427 32.703,72.761 32.703,73.727 34.036,75.06 34.036,80.137 36.322,82.423 ; R1.1 37.658,106.656 36.843,107.471 34.213,107.471 32.604,105.862 27.481,105.862 25.872,104.252 25.872,83.983 27.432,82.423 36.322,82.423 ; C11.2 44.06,83.279 42.317,81.536 42.317,80.043 42.562,79.798 42.562,78.304 42.354,78.096 40.26,78.096 40.002,78.354 40.002,83.049 39.624,83.428 39.624,83.439 38.685,84.378 U2.5 37.084,84.327 37.084,83.185 36.322,82.423 ; 53.195,94.633 53.458,94.896 C2.2@53.458,99.154 ; C2.2 C2.2@53.458,99.154 ; J4.11 J4.09 ; J4.07 J4.09 ; C2.2@53.458,99.154 53.908,98.704 55.068,98.704 55.548,98.224 57.1,98.224 58.03,99.154 C3.2 58.03,104.766 58.775,105.511 60.038,105.511 68.446,113.919 128.27,113.919 142.549,99.64 J4.09
  Top Layer w0.3: C11.2 44.485,83.864 44.485,85.498 44.958,85.971 v1(44.958,86.233) ; v1(46.99,95.25) 47.176,95.064 47.454,95.064 C4.2@48.759,93.759 ; C4.2 C4.2@48.759,93.759 ; C5.2 C5.2@53.195,93.759 ; C10.2 59.173,92.296 57.903,93.566 C6.2 57.903,93.886 56.666,95.123 54.719,95.123 53.78,94.184 53.62,94.184 C5.2@53.195,93.759 ; C4.2@48.759,93.759 48.759,94.606 49.276,95.123 52.705,95.123 53.195,94.633 C5.2@53.195,93.759
  Bottom Layer w0.25: J10.1 142.367,94.038 J4.09
  Bottom Layer w0.3: v1(44.958,86.233) 44.958,86.495 44.544,86.909 44.544,94.146 45.648,95.25 v1(46.99,95.25)
Out5: C7.2 C8.2 D1.A D2.A J3.1 J4.13 J4.15 J4.17 J6.5 J7.5 J8.5 U2.1 U2.3 U4.19 | length 284.7
  Top Layer w0.3: J3.1 32.614,95.972 33.401,96.759 33.401,98.422 32.771,99.052 28.53,99.052 27.834,98.356 27.834,90.988 31.954,86.868 35.205,86.868 35.44,86.633 35.44,86.139 35.726,85.853 36.664,85.853 36.95,86.139 36.95,86.633 U2.1 37.212,86.741 v1(39.116,86.741) ; v1(38.867,82.677) 38.681,82.491 38.156,82.491 35.462,79.797 35.462,74.685 34.672,73.895 34.672,56.222 38.189,52.705 v1(43.688,52.705) ; v1(43.434,86.741) 43.434,86.962 44.06,87.588 C7.2@44.06,88.613 ; C7.2 C7.2@44.06,88.613 ; v1(48.641,91.059) 48.641,88.782 C8.2 48.632,88.613 47.141,87.122 45.551,87.122 C7.2@44.06,88.613 ; v1(54.61,106.172) 53.685,107.097 D1.A ; D2.A D1.A ; v1(64.135,113.284) 58.511,113.284 D1.A ; U4.19 125.984,66.548 127.381,66.548 ; J8.5 124.587,82.804 v1(124.587,75.311) ; v1(128.653,67.816) 128.649,67.816 127.381,66.548 ; J6.5 127.381,66.548
  Bottom Layer w0.3: v1(38.867,82.677) 38.867,83.903 38.266,84.505 38.266,85.346 38.93,86.011 38.93,86.555 v1(39.116,86.741) v1(43.434,86.741) ; v1(43.688,52.705) v1@43.728,52.745 ; v1(48.641,91.059) 54.61,97.028 v1(54.61,106.172) ; v1(64.135,113.284) 67.564,113.284 89.653,91.195 93.797,91.195 94.733,90.259 94.733,88.383 J7.5 J8.5 ; v1(124.587,75.311) 128.651,71.247 128.651,67.818 v1(128.653,67.816) ; J4.13 J4.15 J4.17 152.179,85.269 152.179,68.232 J6.5
PA2: J10.3 U1.12 | length 167.9
  Top Layer w0.25: 37.084,73.533 47.137,73.533 47.923,72.747 U1.12
  Top Layer w0.3: v1(35.687,72.644) 36.576,73.533 37.084,73.533
  Bottom Layer w0.3: v1(35.687,72.644) 35.814,72.517 35.814,67.765 33.971,65.922 33.971,56.02 52.145,37.846 116.332,37.846 137.287,58.801 J10.3
PA3: J10.4 U1.13 | length 142.4
  Top Layer w0.25: v1(37.211,70.866) 37.255,70.822 U1.13
  Bottom Layer w0.25: v1(37.211,70.866) 36.319,69.974 36.319,67.556 34.476,65.713 34.476,56.229 42.27,48.435 110.671,48.435 134.747,72.511 J10.4
PA8: J9.01 U1.29 | length 84.1
  Top Layer w0.25: U1.29 49.923,66.831 49.776,66.978 49.776,68.201 50.255,68.681 51.955,68.681 51.999,68.681 52.416,68.264 v1(52.416,67.026) ; v1(58.552,73.086) 58.357,73.282 58.357,74.056 57.658,74.755 57.658,76.327 v1(62.865,81.534) ; v1(75.057,86.487) 87.088,98.518 93.057,98.518 J9.01
  Bottom Layer w0.25: v1(52.416,67.026) 52.54,66.902 53.551,66.902 53.905,66.548 55.496,66.548 59.475,70.527 59.475,72.103 58.552,73.026 v1(58.552,73.086) ; v1(62.865,81.534) 68.577,87.246 72.253,87.246 73.012,86.487 v1(75.057,86.487)
PA9: J9.02 U1.30 | length 83.2
  Top Layer w0.25: U1.30 50.423,65.398 50.421,65.4 50.421,66.323 50.57,66.473 50.57,67.193 v1(50.766,67.388) ; v1(58.48,71.588) 60.395,73.503 60.395,75.254 v1(62.865,77.724) ; v1(73.025,81.661) 87.342,95.978 101.947,95.978 106.172,100.203 J9.02
  Bottom Layer w0.25: v1(50.766,67.388) 50.77,67.388 51.816,68.434 52.222,68.434 52.749,68.961 57.23,68.961 58.365,70.096 58.365,71.473 v1(58.48,71.588) ; v1(62.865,77.724) 66.802,81.661 v1(73.025,81.661)
PA10: J9.03 U1.31 | length 102.8
  Top Layer w0.25: v1(49.955,62.35) 50.055,62.35 50.923,63.218 U1.31 ; v1(52.451,57.785) 53.594,56.642 61.065,56.642 61.575,56.132 v1(61.851,56.132) ; v1(71.882,59.944) 72.067,60.129 72.067,66.481 82.143,76.557 82.143,82.632 92.949,93.438 101.693,93.438 108.712,100.457 J9.03
  Bottom Layer w0.25: v1(49.955,62.35) 49.952,62.347 48.888,62.347 47.909,61.368 47.909,60.549 49.046,59.412 50.824,59.412 v1(52.451,57.785) ; v1(61.851,56.132) 63.493,57.775 63.493,58.496 64.941,59.944 67.561,59.944 67.662,60.045 68.482,60.045 68.583,59.944 v1(71.882,59.944)
PA11: R5.1 U1.32 | length 75.7
  Top Layer w0.25: v1(37.338,102.235) 38.989,102.235 40.226,100.998 R5.1 ; v1(38.836,53.949) 48.615,53.949 50.413,55.747 50.413,61.408 51.423,62.418 U1.32
  Bottom Layer w0.25: v1(37.338,102.235) 37.338,85.811 37.281,85.754 37.281,73.129 38.836,71.574 v1(38.836,53.949)
PA12: R6.1 R7.2 U1.33 | length 83.2
  Top Layer w0.25: v1(35.306,89.662) 37.144,91.5 39.308,91.5 39.718,91.91 R6.1 39.878,92.87 v1(39.878,95.377) ; R7.2 42.672,99.55 v1(42.672,97.917) ; U1.33 51.923,62.239 51.209,61.525 51.209,57.627 51.923,56.913 51.923,55.9 51.923,52.558 52.413,52.068 v1(52.413,51.901)
  Bottom Layer w0.25: v1(35.306,89.662) 35.306,78.192 35.534,77.964 35.534,74.197 38.201,71.53 38.201,68.314 34.956,65.069 34.956,56.428 39.669,51.715 44.693,51.715 45.657,52.679 51.635,52.679 v1(52.413,51.901) ; v1(39.878,95.377) 40.005,95.377 42.545,97.917 v1(42.672,97.917)
PB1: J6.2 U1.19 | length 131.5
  Top Layer w0.25: v1(45.049,67.832) 45.059,67.822 U1.19 ; v1(73.279,62.357) 150.412,62.357 151.604,63.549 151.604,72.087 150.652,73.039 150.652,74.011 J6.2
  Bottom Layer w0.25: v1(45.049,67.832) 44.944,67.832 43.968,68.808 42.897,68.808 42.267,68.178 42.267,65.184 44.202,63.249 49.34,63.249 49.431,63.34 53.407,63.34 54.662,62.085 58.38,62.085 59.896,63.601 61.624,63.601 62.868,62.357 v1(73.279,62.357)
PB5: SW1.1 U1.41 | length 43.5
  Top Layer w0.25: U1.41 55.951,67.322 57.481,65.792 59.433,65.792 62.204,63.021 62.204,62.201 61.624,61.621 60.44,61.621 60.179,61.883 v1(59.903,61.883) ; v1(58.418,55.501) 58.418,38.88 SW1.1
  Bottom Layer w0.25: v1(58.418,55.501) 59.903,56.985 v1(59.903,61.883)
PB6: SW2.1 U1.42 | length 27.7
  Top Layer w0.25: U1.42 56.247,67.822 57.797,66.272 61.133,66.272 62.551,67.691 65.281,67.691 68.072,64.9 v1(68.072,59.055)
  Bottom Layer w0.25: SW2.1 67.441,58.86 67.877,58.86 v1(68.072,59.055)
PB7: SW3.1 U1.43 | length 14.3
  Top Layer w0.25: U1.43 55.887,68.322 55.891,68.318 56.43,68.318 57.996,66.752 60.032,66.752 61.511,68.231 61.511,71.075 SW3.1
PB8: SW4.1 U1.45 | length 31.5
  Top Layer w0.25: U1.45 56.375,69.322 56.376,69.321 57.033,69.321 58.641,67.712 59.634,67.712 60.041,68.119 60.041,69.118 59.531,69.628 59.531,71.96 63.956,76.385 63.956,84.005 63.337,84.624 63.337,89.538 SW4.1
PB9: SW5.1 U1.46 | length 43.9
  Top Layer w0.25: U1.46 56.021,69.822 56.51,70.311 v1(56.786,70.311) ; v1(60.325,104.521) 62.967,107.163 63.69,107.163 SW5.1
  Bottom Layer w0.25: v1(56.786,70.311) 56.782,70.314 56.782,72.665 57.689,73.571 57.689,73.907 57.957,74.176 57.964,74.176 58.279,74.491 59,74.491 60.328,75.819 60.328,78.064 60.551,78.287 60.551,104.019 60.325,104.245 v1(60.325,104.521)
PB10: J6.3 U1.21 U4.17 | length 126.9
  Top Layer w0.25: v1(43.307,67.818) 43.583,67.818 43.869,67.532 43.949,67.532 44.659,66.822 U1.21
  Top Layer w0.3: v1(76.454,69.088) 85.471,78.105 U4.17 125.984,71.628 J6.3
  Bottom Layer w0.3: v1(43.307,67.818) 43.307,67.556 42.772,67.021 42.772,65.394 44.412,63.754 49.131,63.754 49.483,64.106 55.375,64.106 56.891,62.59 58.171,62.59 59.687,64.106 61.833,64.106 62.185,63.754 74.46,63.754 76.454,65.748 v1(76.454,69.088)
PB11: J6.4 U1.22 U4.18 | length 119
  Top Layer w0.25: v1(43.787,66.294) 43.815,66.322 U1.22
  Top Layer w0.3: v1(74.168,64.897) 84.836,75.565 U4.18 125.984,69.088 J6.4
  Bottom Layer w0.3: v1(43.787,66.294) 43.973,66.108 43.973,65.628 44.704,64.897 55.334,64.897 57.111,63.12 57.951,63.12 59.728,64.897 v1(74.168,64.897)
PB13: J7.2 U1.26 | length 74.5
  Top Layer w0.25: U1.26 48.423,64.876 48.724,65.177 49.099,65.177 49.246,65.323 49.246,66.828 48.786,67.288 v1(48.786,67.564) ; v1(59.182,76.073) 59.359,76.073 62.788,79.502 v1(62.966,79.502) ; v1(97.917,92.448) 98.044,92.321 98.044,85.227 v1(98.171,85.1)
  Bottom Layer w0.25: v1(48.786,67.564) 48.981,67.759 48.981,68.539 49.356,68.914 51.963,68.914 54.655,71.607 55.046,71.607 57.209,73.77 57.209,74.161 59.121,76.073 v1(59.182,76.073) ; v1(62.966,79.502) 68.502,85.038 98.109,85.038 v1(98.171,85.1) ; J7.2 95.758,94.869 97.917,92.71 v1(97.917,92.448)
PB15: J7.3 U1.28 | length 78.1
  Top Layer w0.25: v1(47.371,62.23) 48.435,62.23 49.423,63.218 U1.28
  Top Layer w0.3: v1(53.011,53.848) 53.074,53.785 55.156,53.785 v1(55.219,53.721) ; v1(57.658,60.706) 61.849,60.706 65.532,64.389 v1(65.532,65.912) ; v1(73.66,79.502) 73.66,79.629 80.645,86.614 v1(80.645,86.741) ; v1(87.884,86.741) 87.947,86.741 93.535,92.329 J7.3
  Bottom Layer w0.3: v1(47.371,62.23) 47.371,62.114 46.662,61.405 46.662,60.197 v1(53.011,53.848) ; v1(55.219,53.721) 55.219,53.949 57.658,56.388 v1(57.658,60.706) ; v1(65.532,65.912) 65.532,71.374 v1(73.66,79.502) ; v1(80.645,86.741) v1(87.884,86.741)
PC13: R4.2 U1.2 | length 50.9
  Top Layer w0.25: R4.2 46.265,106.555 48.807,104.013 v1(56.515,104.013) ; U1.2 52.923,72.926 53.584,73.587 55.384,73.587 55.977,74.18 v1(56.219,74.18)
  Bottom Layer w0.25: v1(56.219,74.18) 56.219,74.456 57.712,75.949 57.712,76.682 58.573,77.543 59.128,77.543 60.071,78.486 60.071,103.251 59.309,104.013 v1(56.515,104.013)
PC14: C12.2 U1.3 Y1.1 | length 38.9
  Top Layer w0.25: v1(38.989,74.549) 37.999,75.539 37.999,76.991 38.467,77.459 38.467,78.365 Y1.1 38.842,78.34 39.217,77.965 39.712,77.965 40.061,77.616 45.874,77.616 46.562,78.304 46.562,80.048 45.593,81.017 45.593,81.768 46.297,82.472 47.879,82.472 48.774,81.577 C12.2 ; v1(51.431,70.151) 51.599,70.151 52.423,70.975 U1.3
  Bottom Layer w0.25: v1(38.989,74.549) 41.682,71.856 44.832,71.856 47.294,69.394 50.497,69.394 51.253,70.151 v1(51.431,70.151)
PC15: C13.2 U1.4 Y1.2 | length 33.8
  Top Layer w0.25: Y1.2 36.342,79.14 36.717,79.515 37.569,79.515 37.715,79.661 37.715,80.387 38.174,80.846 38.726,80.846 v1(38.914,81.033) ; U1.4 51.923,72.955 52.308,73.34 52.658,73.34 53.385,74.067 54.766,74.067 55.346,74.647 55.346,76.353 54.102,77.597 54.102,80.905 C13.2 53.439,80.738 53.439,80.004 53.086,79.651 v1(53.086,79.375)
  Bottom Layer w0.25: v1(38.914,81.033) 40.108,81.033 40.582,81.508 41.403,81.508 42.15,80.761 42.15,80.529 42.897,79.782 43.91,79.782 44.317,79.375 v1(53.086,79.375)
R/W: U3.5 U4.5 | length 23.1
  Bottom Layer w0.3: U3.5 U4.5
RESET: C1.1 R1.2 SW6.3 SW6.4 U1.7 | length 64.2
  Top Layer w0.25: U1.7 50.423,74.299 v1(50.546,74.422)
  Top Layer w0.3: SW6.3 SW6.4 ; R1.2 35.748,106.196 33.476,103.924 SW6.4 ; v1(45.559,93.726) 45.559,95.643 46.99,97.074 C1.1 ; 46.99,98.298 45.594,96.902 42.252,96.902 41.529,97.625 41.529,100.965 38.699,103.795 SW6.4
  Bottom Layer w0.3: v1(45.559,93.726) 47.626,91.659 47.626,90.639 49.428,88.836 52.807,88.836 54.609,87.034 54.609,78.485 v1(50.546,74.422)
RS: U3.4 U4.4 | length 23.1
  Bottom Layer w0.254: U3.4 U4.4
SWCLK: J2.03 U1.37 | length 72.3
  Top Layer w0.25: J2.03 26.026,70.095 26.026,62.71 26.515,62.221 27.143,62.221 39.834,49.53 50.257,49.53 v1(50.362,49.425) ; U1.37@54.708,65.322 55.348,65.322 55.358,65.312 58.855,65.312 61.019,63.148 61.019,62.806 v1(61.214,62.611)
  Bottom Layer w0.25: v1(50.362,49.425) 50.467,49.53 53.848,49.53 61.214,56.896 v1(61.214,62.611)
SWDIO: J2.02 U1.34 | length 59.1
  Top Layer w0.25: J2.02 26.506,68.035 26.506,62.909 26.714,62.701 27.342,62.701 39.37,50.673 v1(49.53,50.673) ; U1.34 52.423,62.061 52.383,62.021 51.689,61.326 51.689,60.833 52.464,60.058 53.164,60.058 v1(53.359,59.863)
  Bottom Layer w0.25: v1(49.53,50.673) 49.631,50.572 52.484,50.572 53.695,51.783 53.695,53.057 54.229,53.591 54.229,58.221 53.555,58.895 53.555,59.668 v1(53.359,59.863)
VDD: U3.2 U4.2 | length 23.3
  Bottom Layer w0.3: U4.2@83.312,82.296 U4.2 U3.2
VO: U3.3 U4.3 | length 23.1
  Bottom Layer w0.254: U3.3 U4.3
VSS: U3.1 U4.1 | length 23.1
  Bottom Layer w0.3: U3.1 U4.1
pads on no net: J1.04 J4.01 J4.03 J4.05 J6.1 J7.1 J8.1 J8.2 J8.3 J10.5 SW1.2 SW1.4 SW2.2 SW2.4 SW3.2 SW3.4 SW4.2 SW4.4 SW5.2 SW5.4 U1.1 U1.10 U1.11 U1.14 U1.15 U1.16 U1.17 U1.18 U1.20 U1.25 U1.27 U1.38 U1.39 U1.40 U3.

## Polygon pours and split planes (outlines as drawn)
GND on Bottom Layer "NONET_L-01_P-001" (solid, pour order 0): 27.94,24.765 cw(c27.94,27.305) 25.4,27.305 25.4,112.014 cw(c27.94,112.014) 27.94,114.554 151.384,114.554 cw(c151.384,112.014) 153.924,112.014 153.924,27.305 cw(c151.384,27.305) 151.384,24.765 149.606,24.765

## Text inside footprints (layer, text, board x,y; h text height)
J3: Mechanical 13 "PCB EDGE" at 28.314,90.222 h1.27 r270